# Allegro board ARDUINO_UNO_R3.brd
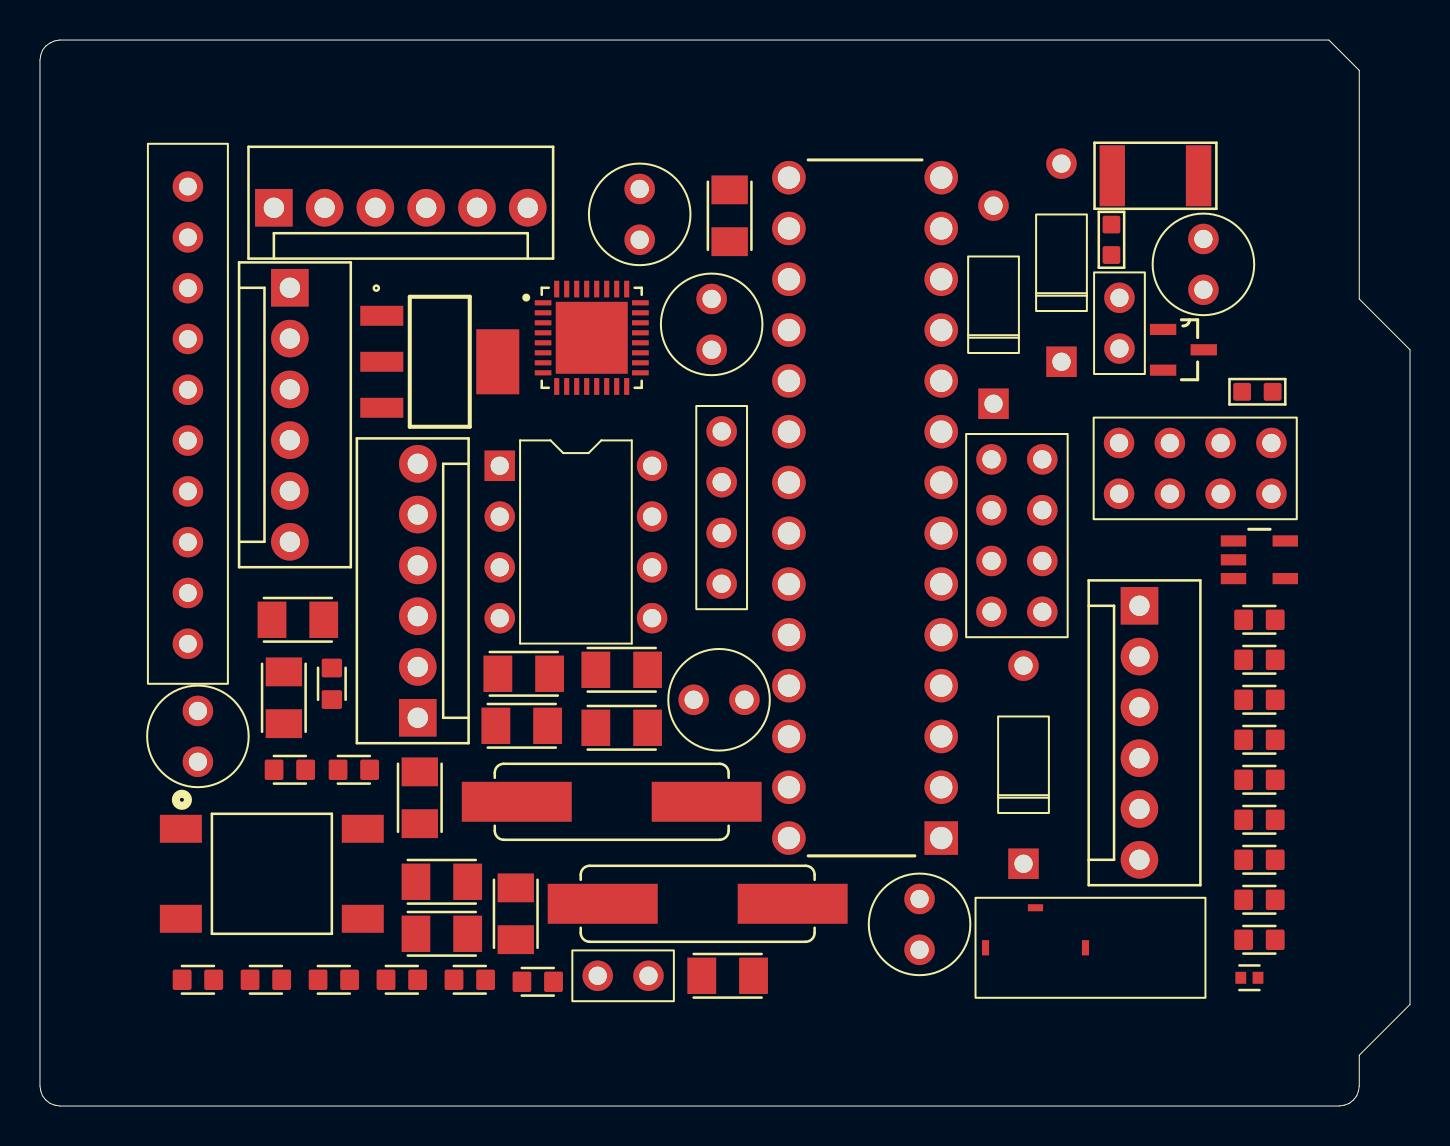
[diagram p0: board, top side]
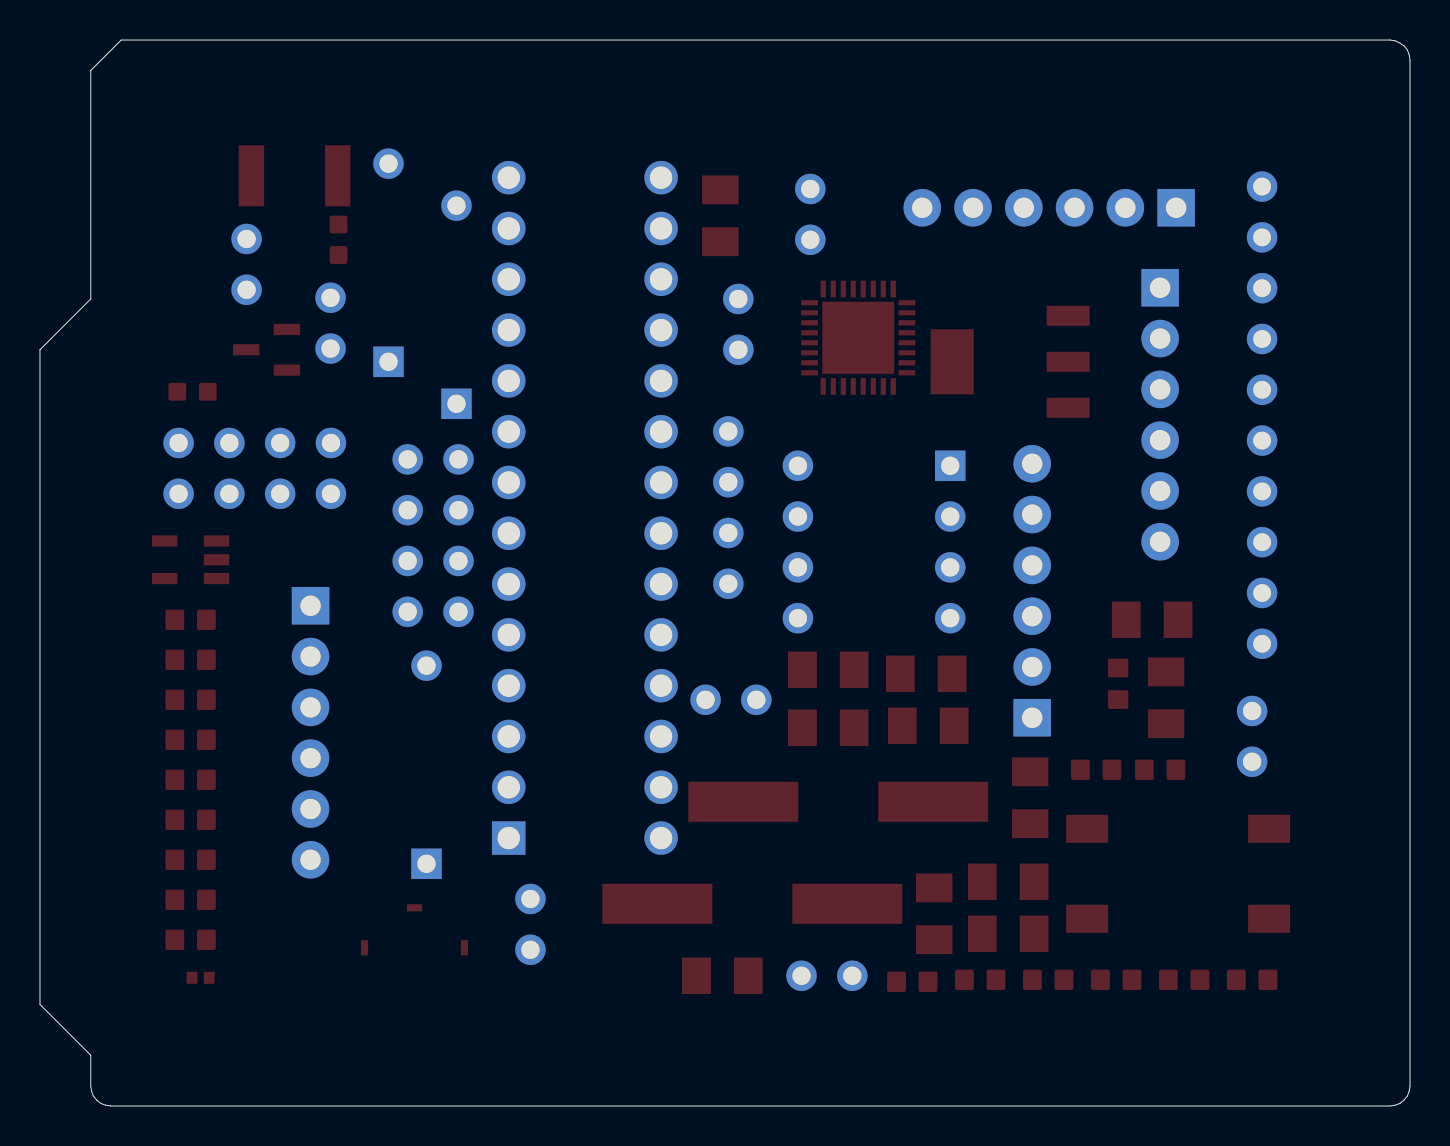
[diagram p1: board, bottom side, seen from below]

Outline 68.53 x 53.3 mm; copper layers: TOP, BOTTOM. Coordinates in mm from the lower left corner of the outline.
Outline path: 0,52.28 0,0.99 0.04,0.74 0.13,0.51 0.3,0.3 0.51,0.13 0.74,0.04 0.99,0 65,0 65.25,0.04 65.49,0.13 65.7,0.3 65.87,0.51 65.95,0.74 66,0.99 66,2.54 68.53,5.08 68.53,37.81 66,40.35 66,51.78 64.47,53.3 0.99,53.3 0.74,53.26 0.51,53.15 0.3,53 0.13,52.79 0.04,52.56 0,52.28

## Design rules (mm)
constraint set DEFAULT: min track width 0.127

## Placement (name value [footprint] x y rotation side)
10X1F-H8.5  IOH  [JUMPER10]  9.4 21.11 90 top
C1  100n  [CAPC3216X180]  19 15.41 270 top
C2  100n  [CAPC3216X180]  12.9 24.31 0 top
C3  1u  [CAPC3216X180]  23.8 9.61 270 top
C4  100n  [CAPC3216X180]  12.2 20.41 270 top
C5  100n  [CAPC3216X180]  29.1 21.81 0 top
C6  100n  [CAPC3216X180]  24.2 21.61 0 top
C7  100n  [CAPC3216X180]  29.1 18.91 0 top
C8  1u  [CAPC3216X180]  24.1 19.01 0 top
C9  22p  [CAPC3216X180]  34.5 44.51 270 top
C11  22p  [CAPC3216X180]  20.1 8.61 0 top
CC  15pF  [CAPC3216X180]  20.1 11.21 0 top
CC2  15pF  [CAPC3216X180]  34.4 6.51 0 top
CD1206-S01575  3pF  [DO41]  49.2 12.11 0 top
CG0603MLC-05E  0.2 pF  [R0603]  60.9 35.71 270 top
CG0603MLC-05E2  0.2 pF  [R0603]  53.6 43.31 0 top
CSTCE16M0V53-R0  16MHZ  [XTAL_FOXSDLF160-20]  28.6 15.21 0 top
D1  m7  [DO41]  47.7 35.11 0 top
D3  CD1206-S01575  [DO41]  51.1 37.21 0 top
F1MF-MSMF050-2  500mA  [F1812]  55.8 46.51 0 top
GREEN  LED  [CAP196]  32.7 20.31 270 top
ICSP  3x2 M  [MOLEX-1X6]  12.5 40.91 270 top
ICSP1  3x2 M  [MOLEX-1X6]  18.9 19.41 90 top
J1  USB  [MOLEX-1X6]  55 25.01 270 top
JP2  2x2 M - NM  [JUMPER4]  34.1 26.11 90 top
L1  BLM21  [BEADC1005X55N]  60.5 6.41 0 top
LYELLOW  LED  [CAP196]  33.6 37.81 0 top
PC1  47u  [CAP196]  44 7.81 0 top
PC2  47u  [CAP196]  58.2 40.81 0 top
POWER  8x1F-H8.5  [JUMPER8]  47.6 24.71 0 top
R1  1M  [RESC1608X50N]  61 22.31 0 top
R2  1M  [RESC1608X50N]  61 24.31 180 top
RESET  SW PUSHBUTTON  [SOIC450P1000X730-4N]  11.6 11.61 0 top
RN1A  10k  [RESC1608X50N]  14.6 21.11 270 top
RN1B  10k  [RESC1608X50N]  24.9 6.21 0 top
RN1C  10k  [RESC1608X50N]  15.7 16.81 0 top
RN2A  1k  [RESC1608X50N]  14.7 6.31 0 top
RN2B  1k  [RESC1608X50N]  21.5 6.31 0 top
RN2C  1k  [RESC1608X50N]  11.3 6.31 0 top
RN2D  1k  [RESC1608X50N]  18.1 6.31 0 top
RN3A  22R  [RESC1608X50N]  7.9 6.31 0 top
RN3B  22R  [RESC1608X50N]  12.5 16.81 0 top
RN3C  22R  [RESC1608X50N]  61 8.31 0 top
RN3D  22R  [RESC1608X50N]  61 10.31 0 top
RN4A  1k  [RESC1608X50N]  61 12.31 0 top
RN4B  1k  [RESC1608X50N]  61 14.31 0 top
RN4C  1k  [RESC1608X50N]  61 16.31 0 top
RN4D  1k  [RESC1608X50N]  61 18.31 0 top
RNID  10k  [RESC1608X50N]  61 20.31 0 top
RXYELLOW  YELLOW  [CAP196]  30 43.31 0 top
SW2  SW SPST  [JUMPER2]  27.9 6.51 0 top
SW3  SW SPST  [JUMPER2]  54 40.41 270 top
T1  FDN340P  [SOT103P240X110-3N]  57.2 37.81 0 top
TXYELLOW  YELLOW  [CAP196]  7.9 17.21 0 top
U1  NCP1117ST50T3G  [SOT230P700X180-4N]  19 37.21 0 top
U2  LP2985-33DBVR  [SOT95P280X145-5N]  61 27.31 0 top
U3  ATMega16U2-MU  [QFN50P500X500X100-33N]  27.6 38.41 0 top
U4  LMV358/SO  [DIP8_3]  23 32.01 0 top
UNK6X1F-H8.5  AD  [MOLEX-1X6]  11.7 44.91 0 top
UNK8X1F-H8.5  IOL  [JUMPER8]  61.6 30.61 90 top
UNK16MHZ  ZTA  [XTAL_FOXSDLF160-20]  32.9 10.11 0 top
X1  power_supply_dc21mmx  [POWER_SUPPLY_DC]  58.3 10.41 180 top
ZU4  ATmega328P-PU  [DIP254P762X457-28]  37.47 46.42 180 top

## Library data of the parts
10X1F-H8.5 = CON10_1
C1-C9 C11 CC CC2 = CAP NP
CD1206-S01575 D1 D3 = DIODE
CG0603MLC-05E CG0603MLC-05E2 = VARISTOR
CSTCE16M0V53-R0 UNK16MHZ = ZTA
F1MF-MSMF050-2 = FUSE
GREEN LYELLOW RXYELLOW TXYELLOW = LED: Tolerance: ***; User Part Number: ***
ICSP ICSP1 = CON6A
J1 = CON4_2
JP2 = CON4A_0: User Part Number: ***
L1 = BEAD
PC1 PC2 = CAP POL: Tolerance: ***; User Part Number: ***
POWER UNK8X1F-H8.5 = CON8: User Part Number: ***
R1 R2 RN1A RN1B RN1C RN2A RN2B RN2C RN2D RN3A RN3B RN3C RN3D RN4A RN4B RN4C RN4D RNID = R2
RESET = SW PUSHBUTTON-SPST-2_0
SW2 SW3 = SW SPST: User Part Number: ***
T1 = MOSFET P DGS
U1 = NCP1117ST50T3G
U2 = LP2986/SO_2
U3 = ATMega32-DIP40_4
U4 = LMV358/SO: Tolerance: ***; User Part Number: ***
UNK6X1F-H8.5 = CON6
X1 = power supply dc21mmx
ZU4 = ATmega162-DIL40small_4

## Footprints (pads in the part's own frame, mm; a bottom-side part is the same pattern mirrored in y, then rotated)
BEADC1005X55N
  rect 0.54x0.6 smd: 1(-0.43,0) 2(0.43,0)
CAP196
  round 1.524 hole 0.914: 1(0,0) 2(0,2.54)
CAPC3216X180
  rect 1.44x1.82 smd: 1(-1.295,0) 2(1.295,0)
DIP8_3
  rect 1.524x1.524 hole 0.914: 1(0,0)
  round 1.524 hole 0.914: 2(0,-2.54) 3(0,-5.08) 4(0,-7.62) 5(7.62,-7.62) 6(7.62,-5.08) 7(7.62,-2.54) 8(7.62,0)
DIP254P762X457-28
  rect 1.676x1.676 hole 1.118: 1(-7.62,33.02)
  round 1.676 hole 1.118: 2(-7.62,30.48) 3(-7.62,27.94) 4(-7.62,25.4) 5(-7.62,22.86) 6(-7.62,20.32) 7(-7.62,17.78) 8(-7.62,15.24) 9(-7.62,12.7) 10(-7.62,10.16) 11(-7.62,7.62) 12(-7.62,5.08) 13(-7.62,2.54) 14(-7.62,0) 15(0,0) 16(0,2.54) 17(0,5.08) 18(0,7.62) 19(0,10.16) 20(0,12.7) 21(0,15.24) 22(0,17.78) 23(0,20.32) 24(0,22.86) 25(0,25.4) 26(0,27.94) 27(0,30.48) 28(0,33.02)
DO41
  rect 1.524x1.524 hole 0.914: 1(0,0)
  round 1.524 hole 0.914: 2(0,9.906)
F1812
  rect 1.27x3.048 smd: 1(-2.159,0) 2(2.159,0)
JUMPER2
  round 1.524 hole 0.914: 1(0,0) 2(2.54,0)
JUMPER4
  round 1.524 hole 0.914: 1(0,0) 2(2.54,0) 3(5.08,0) 4(7.62,0)
JUMPER8
  round 1.524 hole 0.914: 1(0,0) 2(2.54,0) 3(0,2.54) 4(2.54,2.54) 5(0,5.08) 6(2.54,5.08) 7(0,7.62) 8(2.54,7.62)
JUMPER10
  round 1.524 hole 0.889: 1(2,2) 2(4.54,2) 3(7.08,2) 4(9.62,2) 5(12.16,2) 6(14.7,2) 7(17.24,2) 8(19.78,2) 9(22.32,2) 10(24.86,2)
MOLEX-1X6
  rect 1.88x1.88 hole 1.016: 1(0,0)
  round 1.88 hole 1.016: 2(2.54,0) 3(5.08,0) 4(7.62,0) 5(10.16,0) 6(12.7,0)
POWER_SUPPLY_DC
  rect 0.762x0.356 smd rot 89.7: 1(11,2.5) 2(6,2.5)
  rect 0.762x0.356 smd: 3(8.5,0.5)
QFN50P500X500X100-33N
  custom 0.84x0.26 smd: 1(-2.435,1.75) 2(-2.435,1.25) 3(-2.435,0.75) 4(-2.435,0.25) 5(-2.435,-0.25) 6(-2.435,-0.75) 7(-2.435,-1.25) 8(-2.435,-1.75) 17(2.435,-1.75) 18(2.435,-1.25) 19(2.435,-0.75) 20(2.435,-0.25) 21(2.435,0.25) 22(2.435,0.75) 23(2.435,1.25) 24(2.435,1.75)
  custom 0.26x0.84 smd: 9(-1.75,-2.435) 10(-1.25,-2.435) 11(-0.75,-2.435) 12(-0.25,-2.435) 13(0.25,-2.435) 14(0.75,-2.435) 15(1.25,-2.435) 16(1.75,-2.435) 25(1.75,2.435) 26(1.25,2.435) 27(0.75,2.435) 28(0.25,2.435) 29(-0.25,2.435) 30(-0.75,2.435) 31(-1.25,2.435) 32(-1.75,2.435)
  rect 3.6x3.6 smd: 33(0,0)
R0603
  custom 0.889x0.889 smd: 1(0,0.762) 2(0,-0.762)
RESC1608X50N
  custom 0.94x1.02 smd: 1(-0.79,0) 2(0.79,0)
SOIC450P1000X730-4N
  rect 2.1x1.4 smd: 1(-4.55,2.25) 2(4.55,2.25) 3(-4.55,-2.25) 4(4.55,-2.25)
SOT95P280X145-5N
  rect 1.27x0.559 smd: 1(-1.295,0.94) 2(-1.295,0) 3(-1.295,-0.94) 4(1.295,-0.94) 5(1.295,0.94)
SOT103P240X110-3N
  rect 1.321x0.559 smd: 1(-1.016,1.016) 2(-1.016,-1.016) 3(1.016,0)
SOT230P700X180-4N
  rect 2.15x1 smd: 1(-1.9,2.3) 2(-1.9,0) 3(-1.9,-2.3)
  rect 2.15x3.25 smd: 4(3.9,0)
XTAL_FOXSDLF160-20
  rect 5.5x2 smd: 1(-4.75,0) 2(4.75,0)

## Nets
+5V: C1.2 C2.1 C6.2 C7.1 CD1206-S01575.1(K) D3.1(K) ICSP.2 ICSP1.2 PC2.1 POWER.2 POWER.5 RN1C.2 RN2B.2 RN2C.2 RN4C.1 RN4D.1 RNID.2 T1.3(S) U1.2 U1.4 U2.1 U2.3 U3.4 U3.32 U4.8 ZU4.7 ZU4.20
GND: 10X1F-H8.5.7 C1.1 C2.2 C3.1 C4.2 C6.1 C7.2 C9.1 C11.1 CC.2 CC2.2 GREEN.1(CATHODE) ICSP.6 ICSP1.6 LYELLOW.1(CATHODE) PC1.2 PC2.2 POWER.6 POWER.7 RESET.1 RN1B.2 RN2D.1 SW2.2 U1.1 U2.2 U3.3 U3.33 U4.4 X1.1 X1.3 ZU4.8 ZU4.22
AD0: UNK6X1F-H8.5.1 ZU4.23
AD1: UNK6X1F-H8.5.2 ZU4.24
AD2: UNK6X1F-H8.5.3 ZU4.25
AD3: UNK6X1F-H8.5.4 ZU4.26
AD4/SDA: 10X1F-H8.5.9 UNK6X1F-H8.5.5 ZU4.27
AD5/SCI: 10X1F-H8.5.10 UNK6X1F-H8.5.6 ZU4.28
AREF: 10X1F-H8.5.8 C4.1 ZU4.21
CMP: RN1A.2 RN1B.1 U4.3
D+: CG0603MLC-05E.1 CG0603MLC-05E2.1 J1.3 RN3D.1
D-: J1.2 RN3A.1
GATE_CMD: T1.2 U4.1
IO8: 10X1F-H8.5.1 ZU4.14
IO9: 10X1F-H8.5.2 ZU4.15
M8RXD: RN4B.1 U3.9
M8TXD: RN4A.1 U3.8
MISO: 10X1F-H8.5.5 ICSP.1 ZU4.18
MISO2: ICSP1.1 ICSP1.3 ICSP1.4 U3.15 U3.16 U3.17
MOSI: 10X1F-H8.5.4 ICSP.4 ZU4.17
OFFPAGELEFT-L: RN3B.2 RN3C.2
OFFPAGELEFT-R: C3.2 POWER.4 POWER.8 RN1A.1 RN3B.1 RN3C.1 U2.5(OUT) U4.2
PWRIN: D1.2 X1.2
RD+: RN3D.2 U3.29
RD-: RN3A.2 U3.30
RESET: C5.2 CD1206-S01575.2 ICSP.5 POWER.3 RESET.2 RESET.3 RESET.4 RNID.1 SW3.1 SW3.2 ZU4.1
RESET2: D3.2 ICSP1.5 RN1C.1 U3.24
RXLED: RXYELLOW.1(CATHODE) U3.10
SCK: 10X1F-H8.5.6 ICSP.3 U4.5 ZU4.19
SS: 10X1F-H8.5.3 ZU4.16
TO0: RN4B.2 UNK8X1F-H8.5.1 ZU4.2
TO1: RN4A.2 UNK8X1F-H8.5.2 ZU4.3
TO2: UNK8X1F-H8.5.3 ZU4.4
TO3: UNK8X1F-H8.5.4 ZU4.5
TO4: UNK8X1F-H8.5.5 ZU4.6
TO5: UNK8X1F-H8.5.6 ZU4.11
TO6: UNK8X1F-H8.5.7 ZU4.12
TO7: UNK8X1F-H8.5.8 ZU4.13
TP_VUCAP: C8.2 U3.27
TXLED: TXYELLOW.1(CATHODE) U3.11
UGND: C8.1 J1.4 L1.1 SW2.1 U3.28
USBVCC: F1MF-MSMF050-2.2 T1.1 U3.31
USHIELD: CG0603MLC-05E.2 CG0603MLC-05E2.2 J1.5 J1.6(PS2) L1.2
XT1: C9.2 R1.2 U3.1 UNK16MHZ.1
XT2: C11.2 R1.1 U3.2(XTAL2(PC0)) UNK16MHZ.2
XTAL1: CC2.1 CSTCE16M0V53-R0.1 R2.1 ZU4.9
XTAL2: CC.1 CSTCE16M0V53-R0.2 R2.2 ZU4.10(XTAL2)
XUSB: F1MF-MSMF050-2.1 J1.1
N42147: RN2A.1 U4.6 U4.7(OUTPUT)
N42547: D1.1(K) PC1.1 U1.3
N42695: GREEN.2 RN4C.2 RN4D.2
N55415: JP2.2 U3.20
N55435: JP2.4 U3.21
N55633: JP2.3 U3.19
N55637: JP2.1 U3.18
N56351: C5.1 RN2D.2 U3.13
N421831: LYELLOW.2 RN2A.2
N572790: RN2C.1 TXYELLOW.2
N574510: RN2B.1 RXYELLOW.2

Pads without a net: POWER 1; U2 4; U3 5 6 7 12 14 22 23 25 26
